# Altium PCB Battery_Holder_VNA.PcbDoc
Units mm, origin at the board's own origin, x right, y up, seen from the top; angles counter-clockwise.
Board outline 34.5 x 83.6 mm, 2 copper layers (Top Layer, Bottom Layer), stack 1.27 mm thick; 2 components, 6 nets, 15 pads, 2 vias.
Unrouted connection lines stored in the file: 4.
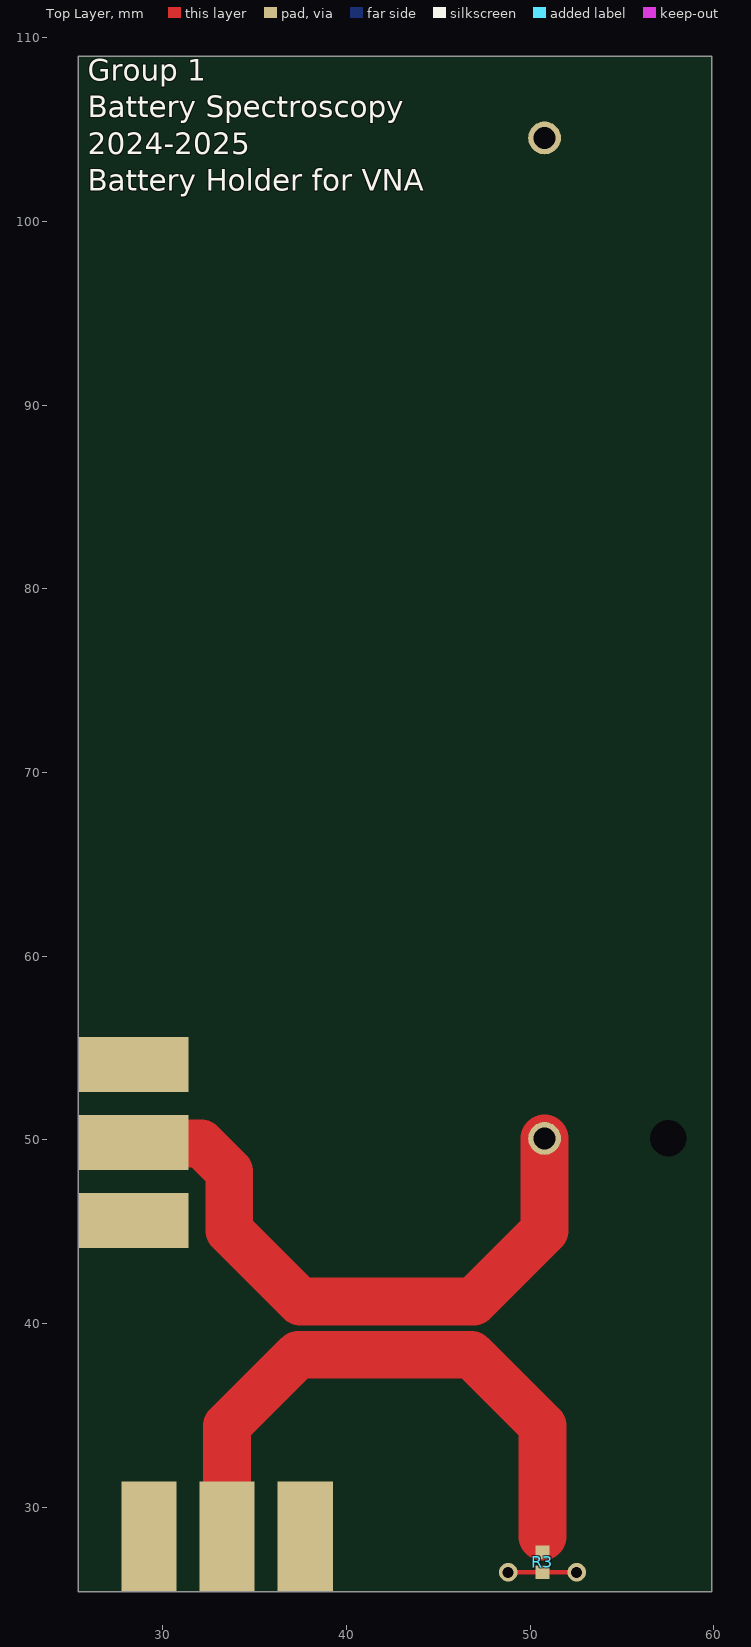
[diagram p0: Top Layer view]
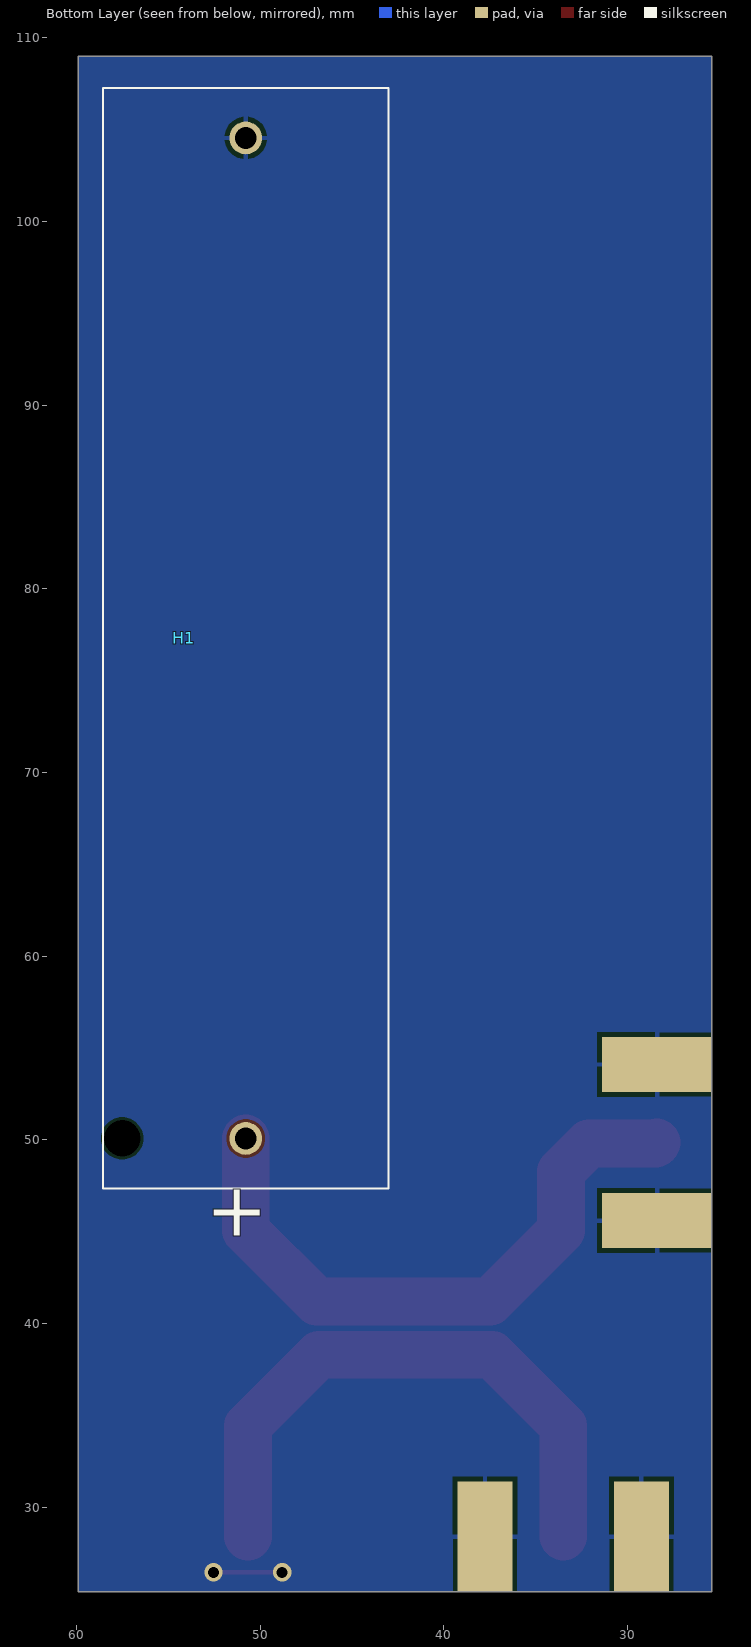
[diagram p1: Bottom Layer view, seen from below]

## Layer stack, top to bottom
Top Solder: solder mask 0.0102, Solder Resist, Dk 3.5
Top Layer: signal copper 0.035
Dielectric 1: dielectric 1.2, FR-4, Dk 4.8
Bottom Layer: signal copper 0.035
Bottom Solder: solder mask 0.0102, Solder Resist, Dk 3.5

## Board outline
25.4,25.4 25.4,109 59.9,109 59.9,25.4

## Design rules (kind name [scope] priority, off if disabled: settings)
Clearance [All] p1: gap=0.15 ignorepadtopadclearanceinfootprint=FALSE
PolygonConnect [All] p1: connectstyle=Relief reliefconductorwidth=0.254 reliefentries=4 polygonreliefangle="90 Angle" airgapwidth=0.254
RoutingVias [All] p1: holewidth=0.711 width=1.27 viastyle="Through Hole" minholewidth=0.711 minwidth=1.27 maxholewidth=0.711 maxwidth=1.27
SolderMaskExpansion [All] p1: expansion=0.102 istentingtop=FALSE
SupplyNets "Schematic Supply Nets" [InNet('GND')] p1: voltage=0.000
Width [All] p1: maxlimit=10 minlimit=0.15 preferedwidth=0.2
30 further rules are at their usual default settings.

## Components (designator, comment, footprint, x,y, rotation, side; value= is the part's Value field where it differs from the comment)
H1 "1015" 1015 50.784,50.079 r90 bottom
R3 "CH0402-50RGFT" RESC1006X63N 50.669,27 r90 top

## Footprints (in the part's own frame and the unit in brackets; to place one, negate y for a bottom-side part, rotate by r counter-clockwise, add the part's x,y. Pads: shape width x height; smd on the part's side, far side on the other; paste and mask are expansions set on the pad)
1015 [mm]
  round 1.785 hole 1.19: 1(0,0) 2(54.48,0)
  round 0.99 hole 1.98 unplated: 4(0,6.73)
  silkscreen extent -2.73,-7.77 57.21,7.77, body extent -2.73,-7.77 57.2,7.77, height 14.9
RESC1006X63N [mm]
  rect 0.75x0.75 smd: 1(-0.55,0) 2(0.55,0)
  body extent -0.5,-0.3 0.5,0.3, height 0.63

## Part data
H1: "Hardware", Manufacturer_Name="Keystone Electronics", Mouser Part Number=534-1015, Datasheet Link=https://componentsearchengine.com/Datasheets/1/1015.pdf, Manufacturer_Part_Number=1015, Mouser Price/Stock=https://www.mouser.co.uk/ProductDetail/Keystone-Electronics/1015?qs=73q%2FgRcW4F2OhJTPPQWZpA%3D%3D
R3: "Resistor", Manufacturer_Name=Vishay, Mouser Part Number=71-CH0402-50RGFT, Datasheet Link=https://www.vishay.com/docs/53014/ch-cha.pdf, Height=0.627mm, Manufacturer_Part_Number=CH0402-50RGFT, Mouser Price/Stock=https://www.mouser.co.uk/ProductDetail/Vishay-Sfernice/CH0402-50RGFT?qs=pwCIrTHziWHsau0e%2F4JCXQ%3D%3D

## Free pads (board coordinates)
  rect 6x3 smd: +6(28.4,45.6) +6(28.4,49.855) +6(28.4,54.11)
  rect 6x3 smd far side: +6(28.4,45.6) +6(28.4,54.11)
  rect 3x6 smd: +6(29.245,28.4) +6(33.5,28.4) +6(37.755,28.4)
  rect 3x6 smd far side: +6(29.245,28.4) +6(37.755,28.4)

## Via types
v1: diameter 1, hole 0.6, Top Layer to Bottom Layer, tented both sides, 2 vias

## Nets (pads, with @x,y where several pads share a name; then routed paths per layer and width w, separated by ;. In a path a pad name is that pad's centre, name@x,y a point inside that pad or via, vN(x,y) a via of type N, cw(c..) or ccw(c..) an arc to the next point about the centre after c; other vN are vias at no path point)
GND: H1.2 pad.+6@28.4,45.6 pad.+6@28.4,54.11 pad.+6@29.245,28.4 pad.+6@37.755,28.4 R3.1 | length 3.7
  Top Layer w0.254: v1(48.8,26.45) R3.1 v1(52.538,26.45)
NetC4_1: 
NetC4_2: 
NetH1_1: H1.1 pad.+6@28.4,49.855 | length 34.5
  Top Layer w2.6: pad.+6@28.4,49.855 28.455,49.8 32.092,49.8 33.616,48.277 33.616,45.069 37.484,41.2 46.915,41.2 50.784,45.069 H1.1
NetJ1_1: pad.+6@33.5,28.4 R3.2 | length 32.4
  Top Layer w2.6: pad.+6@33.5,28.4 33.5,34.431 37.369,38.3 46.8,38.3 50.669,34.431 50.669,28.4
NetJ3_1: 
pads on no net: H1.4

## Polygon pours and split planes (outlines as drawn)
GND on Bottom Layer "NONET_L-01_P-001" (solid, pour order 0): 25.4,25.4 59.9,25.4 59.9,109 25.4,109

## Silkscreen, mask and mechanical layers (free items; w line width, h text height)
Top Overlay:
  text "Group 1 / Battery Spectroscopy / 2024-2025 / Battery Holder for VNA" at 25.9,101.3 h2
Bottom Overlay:
  text "+" at 49.6,43.837 h5
Board Shape:
  the board outline again, w0.013